# Altium PCB PCB_Source_IoT.PcbDoc
Units mm, origin at the board's own origin, x right, y up, seen from the top; angles counter-clockwise.
Board outline 110.06 x 153.67 mm, 2 copper layers (Top Layer, Bottom Layer); 7 components, 17 nets, 108 pads, 2 vias.
Unrouted connection lines stored in the file: 1.
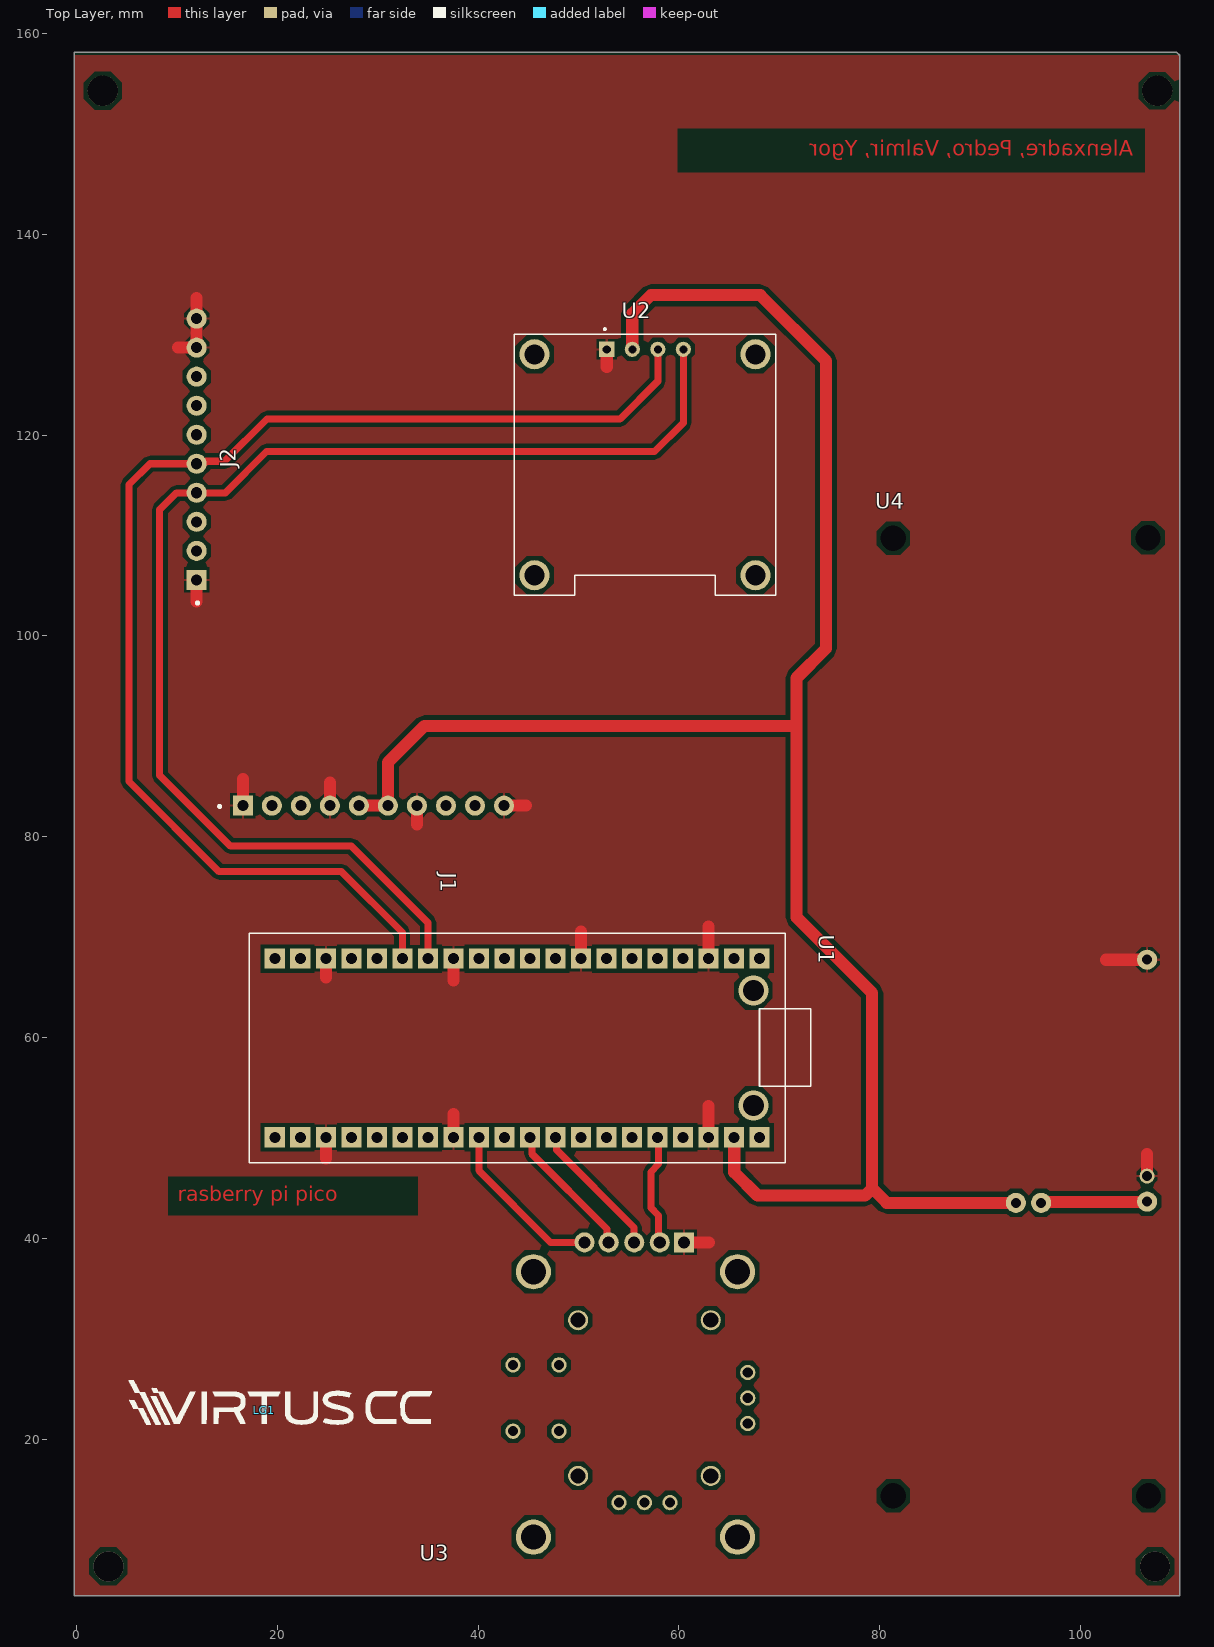
[diagram p0: Top Layer view]
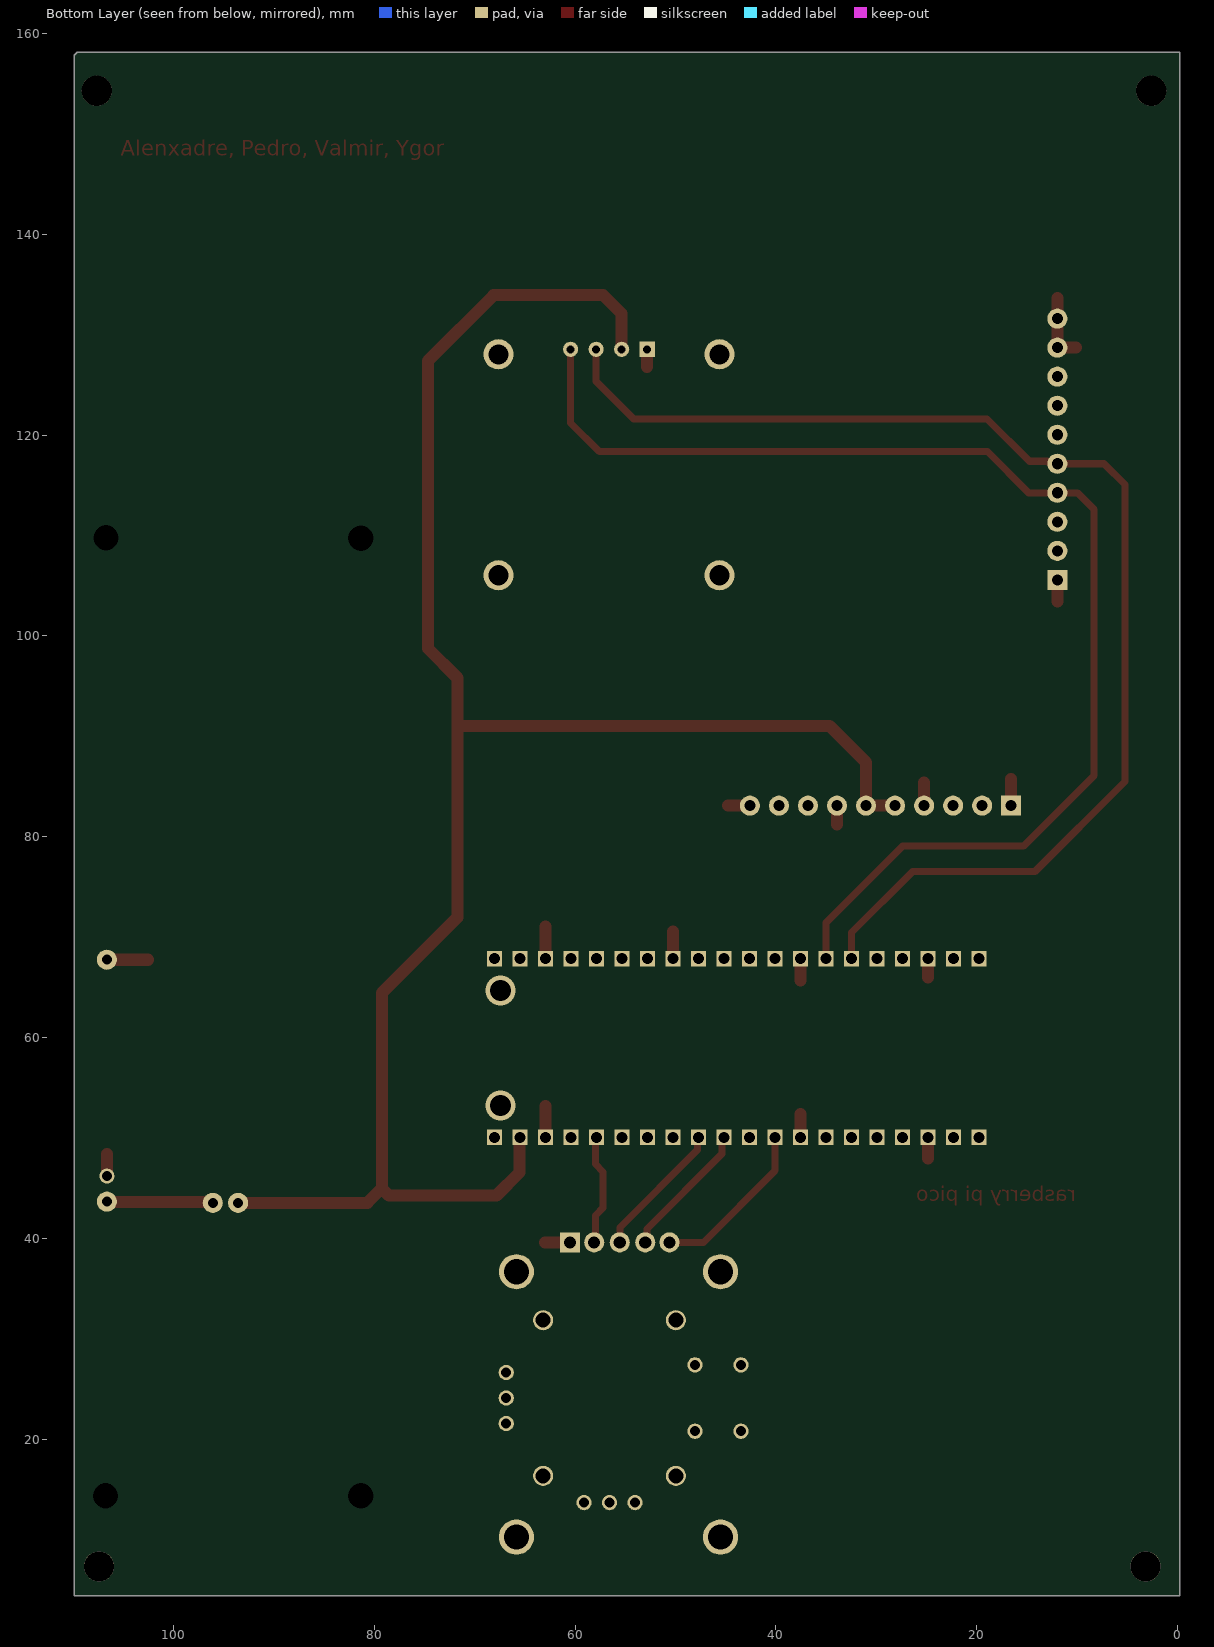
[diagram p1: Bottom Layer view, seen from below]
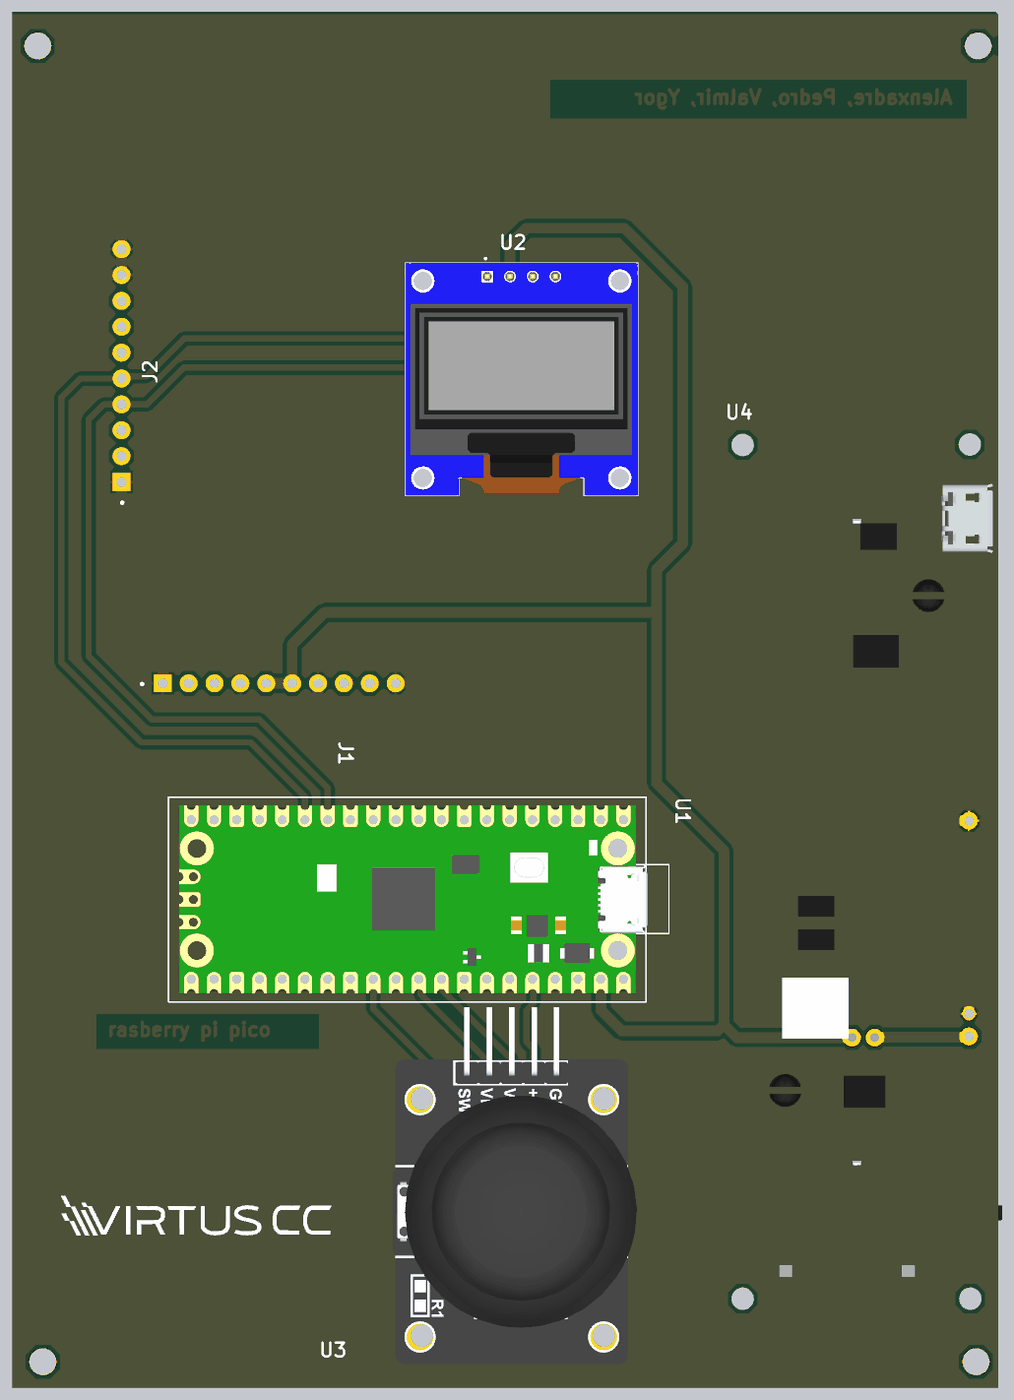
[diagram p2: 3D render of the assembled board from above, using the file's embedded part models]

## Layer stack, top to bottom
Top Solder: solder mask 0.0102, Solder Resist, Dk 3.5
Top Layer: signal copper 0.0356
Dielectric 1: dielectric 0.32, FR-4, Dk 4.8
Bottom Layer: signal copper 0.0356
Bottom Solder: solder mask 0.0102, Solder Resist, Dk 3.5

## Board outline
-0.203,4.445 109.855,4.445 109.855,157.81 109.55,158.115 -0.203,158.115 -0.203,148.844 -0.203,137.185

## Design rules (kind name [scope] priority, off if disabled: settings)
Clearance [All] p1: gap=0.4 ignorepadtopadclearanceinfootprint=FALSE
PolygonConnect [All] p1: connectstyle=Relief reliefconductorwidth=0.254 reliefentries=4 polygonreliefangle="90 Angle" airgapwidth=0.254
RoutingVias [All] p1: holewidth=0.711 width=1.27 viastyle="Through Hole" minholewidth=0.711 minwidth=1.27 maxholewidth=0.711 maxwidth=1.27
SolderMaskExpansion [All] p1: expansion=0.102 istentingtop=FALSE
SupplyNets "Schematic Supply Nets_1" [InNet('VeeR')] p1: voltage=0.000
Width [All] p1: maxlimit=2 minlimit=0.5 preferedwidth=0.7 minimp=50.000000 maximp=50.000000 favimp=50.000000
30 further rules are at their usual default settings.

## Classes and differential pairs
component class Sheet3_Circuito: RASPBERRY

## Components (designator, comment, footprint, x,y, rotation, side; value= is the part's Value field where it differs from the comment)
J1 "NRPN101PAEN-RC" FP-NRPN101PAEN-RC-MFG 24.947,83.111 r0 top
J2 "NRPN101PAEN-RC" FP-NRPN101PAEN-RC-MFG 11.978,113.955 r90 top
LG1 "Logo Virtus" Logo_VirtusCC 18.72,22.936 r0 top
U1 "RASPBERRY_PI_PICO" RASPBERRY_PI_PICO 45.161,58.979 r270 top
U2 "DM-OLED096-636" MODULE_DM-OLED096-636 56.623,117.043 r0 top
U3 "Joystick_Module" JOYSTICK_MODULE 55.801,31.073 r270 top
U4 "WEMOS_1850" WEMOS_18650_BATTERY_SHIELD_V3 91.999,53.34 r90 top

## Footprints (in the part's own frame and the unit in brackets; to place one, negate y for a bottom-side part, rotate by r counter-clockwise, add the part's x,y. Pads: shape width x height; smd on the part's side, far side on the other; paste and mask are expansions set on the pad)
FP-NRPN101PAEN-RC-MFG [mm]
  rect 2x2 hole 1.1 paste-2539.97 mask+0: 1(-8.365,0)
  round 2 hole 1.1 paste-2539.97 mask+0: 2(-5.476,0) 3(-2.587,0) 4(0.302,0) 5(3.191,0) 6(6.08,0) 7(8.969,0) 8(11.858,0) 9(14.747,0) 10(17.636,0)
  silkscreen extent -10.8,-0.21 -10.55,0.04
JOYSTICK_MODULE [mm]
  round 2 hole 1.2: 1(-8.551,-5.207) 2(-8.551,-2.794) 3(-8.551,-0.254) 4(-8.551,2.286)
  rect 2x2 hole 1.2: 5(-8.551,4.699)
  round 3.5 hole 2.5: ""(-5.63,10.033) ""(-5.63,-10.287) ""(20.786,10.033) ""(20.786,-10.287)
  round 2 hole 1.5: ""(-0.804,7.366) ""(-0.804,-5.842) ""(14.69,-5.842) ""(14.69,7.366)
  round 1.524 hole 1: ""(3.641,-7.747) ""(3.641,-12.319) ""(4.403,11.049) ""(6.943,11.049) ""(9.483,11.049) ""(10.245,-7.747) ""(10.245,-12.319) ""(17.357,-1.778) ""(17.357,0.762) ""(17.357,3.302)
  body extent -15.86,-13.54 23.94,13.71, height 2.1
Logo_VirtusCC [mm]
  silkscreen extent -13.5,-1.48 16.66,2.97
MODULE_DM-OLED096-636 [mm]
  rect 1.508x1.508 / inner round 1.508 / far side rect 1.508x1.508 hole 0.8: 1(-3.81,11.5)
  round 1.508 hole 0.8: 2(-1.27,11.5) 3(1.27,11.5) 4(3.81,11.5)
  round 3 hole 2: S1(-11,11) S2(11,11) S3(11,-11) S4(-11,-11)
  silkscreen extent -13,-13 13,13.6, body extent -13,-13 13,13, height 5.66
RASPBERRY_PI_PICO [mm]
  rect 2x2 / inner round 1.508 / far side rect 1.508x1.508 hole 1.1: 3V3(8.89,12.7) 3V3_EN(8.89,15.24) ADC_VREF(8.89,10.16) AGND(8.89,5.08) GND(8.89,17.78) GND2(8.89,-7.62) GND3(8.89,-20.32) GND4(-8.89,17.78) GND5(-8.89,5.08) GND6(-8.89,-7.62) GND7(-8.89,-20.32) GP0(-8.89,22.86) GP1(-8.89,20.32) GP2(-8.89,15.24) GP3(-8.89,12.7) GP4(-8.89,10.16) GP5(-8.89,7.62) GP6(-8.89,2.54) GP7(-8.89,0) GP8(-8.89,-2.54) GP9(-8.89,-5.08) GP10(-8.89,-10.16) GP11(-8.89,-12.7) GP12(-8.89,-15.24) GP13(-8.89,-17.78) GP14(-8.89,-22.86) GP15(-8.89,-25.4) GP16(8.89,-25.4) GP17(8.89,-22.86) GP18(8.89,-17.78) GP19(8.89,-15.24) GP20(8.89,-12.7) GP21(8.89,-10.16) GP22(8.89,-5.08) GP26_A0(8.89,0) GP27_A1(8.89,2.54) GP28_A2(8.89,7.62) RUN(8.89,-2.54) VBUS(8.89,22.86) VSYS(8.89,20.32)
  silkscreen extent -11.43,-27.94 11.43,27.94, body extent -10.5,-26.77 10.5,25.53, height 3.73
WEMOS_18650_BATTERY_SHIELD_V3 [mil]
  round 78.74 hole 39.37: 1(-380,-575)
  round 59.06 hole 39.37: 2(-280,-575)
  round 105 on Mech1: ""(-1535,-640) ""(-1520,405) ""(2220,405)
  round 110 on Mech1: ""(2220,-640)
  body extent -1843,-720 2293,497, height 796

## Part data
J1 J2: library part CMP-25680-000006-1, "CONN HEADER VERT 10POS 2MM", Current Rating=2A, Manufacturer=Sullins, Package=0, Temperature="-40°C to +105°C", Temperature Range High=+105°C, Temperature Range Low=-40°C, Voltage Rating=150V, Automotive=No, Category=Conn, ComponentLink2Description=Datasheet, ComponentLink2URL=https://s3.amazonaws.com/catalogspreads-pdf/PAGE104-105%202mm%20MALE%20HDR%20ST%20RA%20SMT.pdf, Conn Gender=Male, Conn Orientation=Straight, Contact Material=Gold,Nickel, Device Class L1=Connectors, Device Class L2="Headers and Wire Housings", Device Class L3=unset, Digikey Description="CONN HEADER VERT 10POS 2MM", Footprint Url=https://drawings-pdf.s3.amazonaws.com/10531.pdf, Height=5.95mm, Lead Free=Yes, Manufacturer Part Number=NRPN101PAEN-RC, Number of Contacts=10, Number of Rows=1, Octopart=https://octopart.com/nrpn101paen-rc-sullins-18674398, Pitch=2mm, RoHS=TRUE
LG1: library part Logo_Virtus_cc
U1: "Raspberry Pi Board, Arm Cortex-M0+; Core Architecture:Arm; Core Sub-Architecture:Cortex-M0+; Kit Contents:Raspberry Pi Pico Board; No. Of Bits:32Bit; Silicon Core Number:Rp2040; Silicon Manufacturer:Raspberry Pi", Package=None, Check_prices=https://www.snapeda.com/parts/RASPBERRY%20PI%20PICO/Raspberry+Pi/view-part/?ref=eda, MF="Raspberry Pi", MP="RASPBERRY PI PICO", SnapEDA_Link=https://www.snapeda.com/parts/RASPBERRY%20PI%20PICO/Raspberry+Pi/view-part/?ref=snap
U2: "0.96â€ 128 X 64 MONOCHROME GRAPHIC OLED DISPLAY MODULE - I2C", Package=Package, Check_prices=https://www.snapeda.com/parts/DM-OLED096-636/Display+Module/view-part/?ref=eda, MF="Display Module", MP=DM-OLED096-636, SnapEDA_Link=https://www.snapeda.com/parts/DM-OLED096-636/Display+Module/view-part/?ref=snap

## Free pads (board coordinates)
  round 1.524 hole 2.5: 10(81.331,109.728) 11(106.705,109.779) 12(81.331,14.402) 13(106.756,14.402)
  round 2 hole 1: 15(93.548,43.561) 15(96.063,43.561) 16(106.604,67.767)
  round 3 hole 3: ""(2.632,154.28) ""(3.191,7.366) ""(107.391,7.366) ""(107.62,154.28)

## Via types
v1: diameter 3, hole 2.1, Top Layer to Bottom Layer, 2 vias

## Nets (pads, with @x,y where several pads share a name; then routed paths per layer and width w, separated by ;. In a path a pad name is that pad's centre, name@x,y a point inside that pad or via, vN(x,y) a via of type N, cw(c..) or ccw(c..) an arc to the next point about the centre after c; other vN are vias at no path point)
MOD_ABS: J2.6
NetU1_3V3: U1.3V3 U3.4 | length 11.2
  Top Layer w0.7: U1.3V3 57.974,49.976 57.974,47.416 57.201,46.643 57.201,43.07 57.974,42.297 57.974,39.737 U3.4
NetU1_GP22: U1.GP22 U3.1 | length 16.8
  Top Layer w0.7: U1.GP22 40.081,46.761 47.219,39.624 U3.1
NetU1_GP26_A0: U1.GP26_A0 U3.2 | length 13.7
  Top Layer w0.7: U1.GP26_A0 45.351,49.899 45.351,48.449 52.842,40.958 52.842,39.789 U3.2
NetU1_GP27_A1: U1.GP27_A1 U3.3 | length 13.7
  Top Layer w0.7: U1.GP27_A1 47.803,49.987 47.803,48.848 55.537,41.113 55.537,39.69 U3.3@55.575,39.652
RD+: J1.8
RD-: J1.9
RS: J2.7
RX_LOS: J2.8
SCL-: J2.5 U1.GP11 U2.3 | length 125.7
  Top Layer w0.7: U1.GP11 32.461,70.46 26.391,76.53 14.224,76.53 5.258,85.496 5.258,115.062 7.342,117.146 12.69,117.146 12.938,117.395 14.754,117.395 18.974,121.615 54.153,121.615 57.893,125.355 U2.3
SDA: J2.4 U1.GP10 U2.4 | length 125.8
  Top Layer w0.7: U1.GP10 35.001,71.45 27.381,79.07 15.342,79.07 8.306,86.106 8.306,112.573 9.99,114.257 12.69,114.257 14.842,114.257 18.948,118.364 57.582,118.364 60.433,121.215 U2.4
TD+: J1.3
TD-: J1.2
TX_Disable: J2.3
TX_Fault: J2.2
VccR: J1.5 J1.6 pad.15 U1.VSYS U2.2 U4.1 | length 206.4
  Top Layer w0.7: pad.15@96.063,43.561 pad.15@96.126,43.624 ; U4.1@106.54,43.624 U4.1
  Top Layer w1.2: J1.5 J1.6 31.027,87.415 34.646,91.034 71.704,91.034 ; U2.2 55.353,132.086 57.201,133.934 68.097,133.934 74.651,127.381 74.651,98.763 71.704,95.816 71.704,91.034 ; U1.VSYS 65.507,50.063 65.507,46.609 67.818,44.298 78.532,44.298 79.235,45.001 ; pad.15@93.548,43.561 80.675,43.561 79.235,45.001 ; pad.15@96.126,43.624 U4.1@106.54,43.624 ; 71.704,91.034 71.704,71.981 79.235,64.449 79.235,45.001
VeeR: J1.1 J1.4 J1.7 J1.10 J2.1 J2.9 J2.10 pad.16 U1.GND U1.GND2 U1.GND3 U1.GND4 U1.GND5 U1.GND6 U1.GND7 U2.1 U3.5 U4.2 | length 47.8
  Top Layer w0.7: 9.957,128.88 10.134,128.702 ; 11.913,103.353 11.978,103.418 ; 11.913,133.731 11.978,133.665 ; 16.582,85.772 16.637,85.827 ; 24.74,65.913 24.841,66.015 ; 24.816,47.93 24.841,47.955 ; 25.171,85.496 25.249,85.418 ; 33.916,81.222 34.036,81.102 ; 37.516,52.426 37.541,52.4 ; 44.757,83.111 44.856,83.21 ; 50.089,70.739 50.241,70.587 ; 52.781,126.771 52.813,126.803 ; 62.941,71.095 62.992,71.145 ; 62.967,39.624 62.992,39.599 ; 102.464,67.716 102.514,67.767 ; 106.477,48.539 106.604,48.412
  Top Layer w1.2: 10.134,128.702 J2.9 J2.10 11.978,133.665 ; 11.978,103.418 J2.1 ; J1.1 16.582,85.772 ; 24.841,47.955 U1.GND3 ; 24.841,66.015 U1.GND7 ; J1.4 25.249,85.418 ; 33.916,81.222 J1.7 ; U1.GND2 37.541,52.4 ; 37.541,65.684 U1.GND6 ; J1.10 44.757,83.111 ; U1.GND5 50.241,70.587 ; 52.813,126.803 U2.1 ; U3.5 62.967,39.624 ; U1.GND 62.941,53.188 ; U1.GND4 62.941,71.095 ; 102.514,67.767 pad.16 ; U4.2 106.604,48.412
pads on no net: U1.3V3_EN U1.ADC_VREF U1.AGND U1.GP0 U1.GP1 U1.GP2 U1.GP3 U1.GP4 U1.GP5 U1.GP6 U1.GP7 U1.GP8 U1.GP9 U1.GP12 U1.GP13 U1.GP14 U1.GP15 U1.GP16 U1.GP17 U1.GP18 U1.GP19 U1.GP20 U1.GP21 U1.GP28_A2 U1.RUN U1.VBUS U2.S1 U2.S2 U2.S3 U2.S4 U3. U4.
copper on no net:
  other v1: 67.407,53.264 67.407,64.694

## Polygon pours and split planes (outlines as drawn)
VeeR on Top Layer "VEER_L01_P001" (solid, pour order 1): -0.203,157.81 109.855,157.81 109.855,4.445 -0.203,4.445

## Other copper
Top Layer:
  text "Alenxadre, Pedro, Valmir, Ygor" at 105.215,147.82 h1.52

## Silkscreen, mask and mechanical layers (free items; w line width, h text height)
Dimensions:
  circle w0.254: c2.632,154.28 r1.5
  lines w0.3: -0.203,157.81 -0.203,0.178 111.506,0.178 111.557,0.229 111.557,157.963 -0.051,157.963
Board Shape:
  lines w0.3: -0.178,0.102 110.947,0.102 111.557,0.102 111.557,157.81 -0.178,157.81 -0.178,0.102

## Text inside footprints (layer, text, board x,y; h text height)
U1: Top Layer "rasberry pi pico" at 10.084,43.739 h1.5